# EAGLE board DDS Tone Shield (EAGLE 8.1.1)
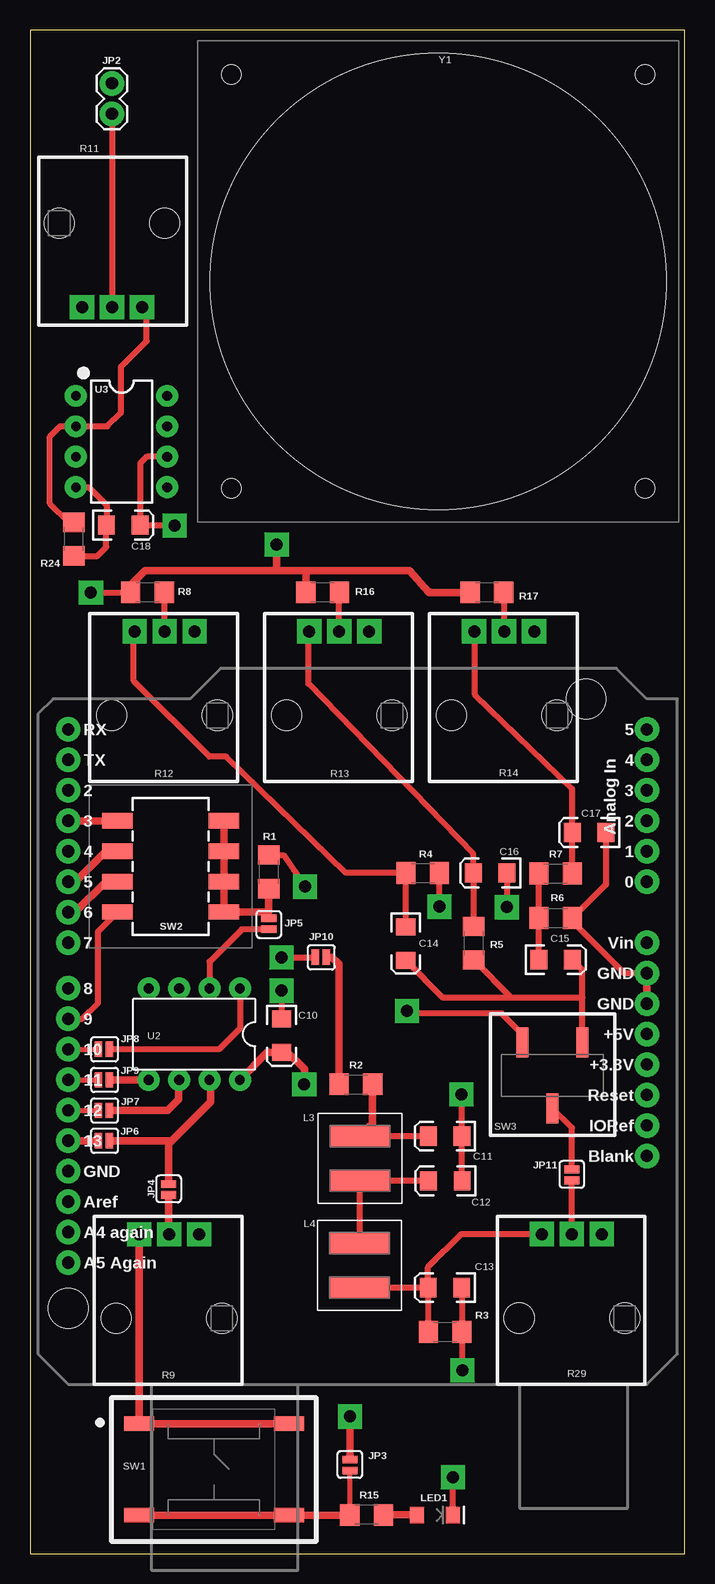
[diagram p0: board, top side]
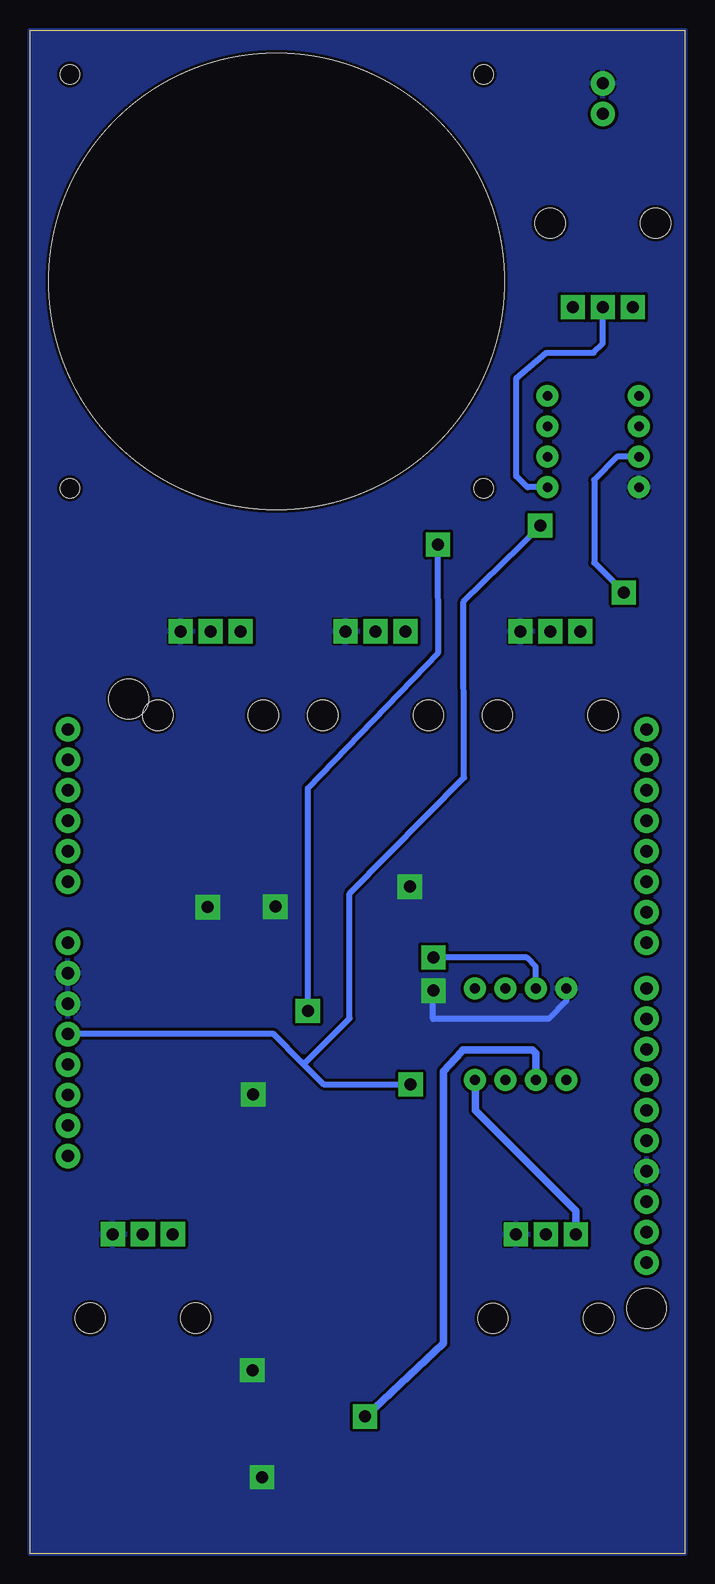
[diagram p1: board, bottom side, seen from below]

Size 54.61 x 127 mm. Coordinates in mm from the lower left corner, seen from the top.
Outline: 0,0 54.61,0 54.61,127 0,127 0,0
Copper layers (1*16): Top 0.035mm / dielectric 1.5mm / Bottom 0.035mm
Design rules "EA OthermillDRC_30_deg_v2": minimum track width 6mil, minimum drill 0.8mm, track to track 6mil, track to pad 6mil, pad to pad 6mil, via to via 6mil, smd to smd 0mil, copper to edge 0mil, drill to drill 6mil, minimum pad ring 20mil, minimum via ring 20mil, stop-mask expansion 1mil, vias tented up to drill 30mil, thermal gap 6mil

## Footprints (pad centres in the part's own frame; a part is rotated, then mirrored left to right if it is on the bottom)
EIA3216 = smd 1.4 x 1.6: A 1.4,0; C -1.4,0
DUEMILANOVE_SHIELD = drill 1.016 pad 1.88: 3.3V 50.8,26.67; 5V 50.8,29.21; A0 50.8,41.91; A1 50.8,44.45; A2 50.8,46.99; A3 50.8,49.53; A4 50.8,52.07; A5 50.8,54.61; AREF 2.54,15.24; AREF1 2.54,12.7; AREF2 2.54,10.16; D2 2.54,49.53; D3 2.54,46.99; D4 2.54,44.45; D5 2.54,41.91; D6 2.54,39.37; D7 2.54,36.83; D8 2.54,33.02; D9 2.54,30.48; D10 2.54,27.94; D11 2.54,25.4; D12 2.54,22.86; D13 2.54,20.32; GND@0 50.8,31.75; GND@1 50.8,34.29; GND@2 2.54,17.78; RES 50.8,24.13; RES1 50.8,21.59; RES2 50.8,19.05; RX 2.54,54.61; TX 2.54,52.07; VIN 50.8,36.83 | hole 3.302: 45.72,57.15; 2.54,6.35
1X02 = drill 1.016 pad 1.88: 1 0,0; 2 2.54,0
SMT-JUMPER_2_NC_PASTE_SILK = smd 0.635 x 1.27: 1 -0.506,0; 2 0.406,0
SDR0503-472JL = smd 5 x 1.8: P$1 0,1.85; P$2 0,-1.85
LED-1206 = smd 1.2 x 1.4: A -1.5,0; C 1.5,0
1206 = smd 1.6 x 1.8: 1 -1.4,0; 2 1.4,0
RK09K/RK09D_SERIES = drill 1 square: P$1 -2.5,-7; P$2 0,-7; P$3 2.5,-7 | hole 2.5: -4.4,0; 4.4,0
3CSH9_MEC_PUSHBUTTON = smd 2.5 x 1.2: P$1 -6.25,3.81; P$2 -6.25,-3.81; P$3 6.25,-3.81; P$4 6.25,3.81
DIPSWITCH-04-SMD = smd 1.27 x 2.54: 1 -3.81,4.445; 2 -1.27,4.445; 3 1.27,4.445; 4 3.81,4.445; 5 3.81,-4.445; 6 1.27,-4.445; 7 -1.27,-4.445; 8 -3.81,-4.445
JS102011SAQN = smd 1 x 2.5: P$1 -2.5,-2.75; P$2 2.5,-2.75; P$3 0,2.75
PDIP08_300MIL = drill 0.813: 1 -3.81,-3.81; 2 -1.27,-3.81; 3 1.27,-3.81; 4 3.81,-3.81; 5 3.81,3.81; 6 1.27,3.81; 7 -1.27,3.81; 8 -3.81,3.81
DIP08 = drill 0.813 pad 1.626: 1 -3.81,-3.81; 2 -1.27,-3.81; 3 1.27,-3.81; 4 3.81,-3.81; 5 3.81,3.81; 6 1.27,3.81; 7 -1.27,3.81; 8 -3.81,3.81
CSS-40408N = hole 1.6: -17.25,-17.25; 17.25,-17.25; 17.25,17.25; -17.25,17.25 | hole 38: 0,0

## Placement (x,y rotation side)
C10  100nF  [EIA3216]  20.99,43.16 270 top
C11  47nF  [EIA3216]  34.62,34.79 180 top
C12  100nF  [EIA3216]  34.64,31.07 180 top
C13  47nF  [EIA3216]  34.61,22.16 180 top
C14  22nF  [EIA3216]  31.34,50.84 270 top
C15  22nF  [EIA3216]  43.84,49.5 0 top
C16  22nF  [EIA3216]  38.38,56.72 180 top
C17  22nF  [EIA3216]  46.63,60.1 180 top
C18  100nF  [EIA3216]  7.78,85.73 0 top
FRAME2  FRAME-LEDGER  [CREATIVE_COMMONS]  0.71,146.77 0 top  (outside the outline)
JP1  Arduino jumpers  [DUEMILANOVE_SHIELD]  0.65,14.09 0 top
JP2  Speaker Header  [1X02]  6.84,120.01 90 top
JP3  JUMPER-SMT_2_NC_PASTE_SILK  [SMT-JUMPER_2_NC_PASTE_SILK]  26.68,7.42 90 top
JP4  JUMPER-SMT_2_NC_PASTE_SILK  [SMT-JUMPER_2_NC_PASTE_SILK]  11.57,30.4 90 top
JP5  JUMPER-SMT_2_NC_PASTE_SILK  [SMT-JUMPER_2_NC_PASTE_SILK]  19.91,52.44 270 top
JP6  JUMPER-SMT_2_NC_PASTE_SILK  [SMT-JUMPER_2_NC_PASTE_SILK]  6.22,34.41 0 top
JP7  JUMPER-SMT_2_NC_PASTE_SILK  [SMT-JUMPER_2_NC_PASTE_SILK]  6.22,36.93 0 top
JP8  JUMPER-SMT_2_NC_PASTE_SILK  [SMT-JUMPER_2_NC_PASTE_SILK]  6.22,42.04 0 top
JP9  JUMPER-SMT_2_NC_PASTE_SILK  [SMT-JUMPER_2_NC_PASTE_SILK]  6.22,39.48 0 top
JP10  JUMPER-SMT_2_NC_PASTE_SILK  [SMT-JUMPER_2_NC_PASTE_SILK]  24.3,49.7 0 top
JP11  JUMPER-SMT_2_NC_PASTE_SILK  [SMT-JUMPER_2_NC_PASTE_SILK]  45.19,31.61 90 top
L3  4.7mH  [SDR0503-472JL]  27.51,32.95 0 top
L4  4.7mH  [SDR0503-472JL]  27.48,24.03 0 top
LED1  BLUE  [LED-1206]  33.77,3.21 0 top
R1  10kohm  [1206]  19.93,56.82 90 top
R2  270ohm  [1206]  27.18,39.12 0 top
R3  270ohm  [1206]  34.62,18.48 0 top
R4  1kohm  [1206]  32.76,56.73 0 top
R5  3.9kohm  [1206]  37.01,50.87 90 top
R6  1kohm  [1206]  43.84,52.98 0 top
R7  3.9kohm  [1206]  43.84,56.69 0 top
R8  2200  [1206]  9.81,80.12 180 top
R9  5kohm  [RK09K/RK09D_SERIES]  11.6,19.6 180 top
R11  5kohm  [RK09K/RK09D_SERIES]  6.84,110.9 0 top
R12  10kohm  [RK09K/RK09D_SERIES]  11.22,69.87 180 top
R13  10kohm  [RK09K/RK09D_SERIES]  25.79,69.87 180 top
R14  10kohm  [RK09K/RK09D_SERIES]  39.55,69.87 180 top
R15  330ohm  [1206]  28.07,3.22 180 top
R16  2200  [1206]  24.41,80.12 180 top
R17  2200  [1206]  38.11,80.12 180 top
R24  270ohm  [1206]  3.67,84.56 90 top
R29  100k  [RK09K/RK09D_SERIES]  45.2,19.62 180 top
SW1  PUSHBUTTON  [3CSH9_MEC_PUSHBUTTON]  15.34,7.01 0 top
SW2  DIP-04SMD  [DIPSWITCH-04-SMD]  11.74,57.28 90 top
SW3  Slide Switch  [JS102011SAQN]  43.58,39.87 180 top
U2  ATTINY85-20P  [PDIP08_300MIL]  13.7,43.29 180 top
U3  LM386N  [DIP08]  7.64,92.69 270 top
Y1  Speaker  [CSS-40408N]  34.04,106.05 0 top

## Library data of the parts
C10-C18 FRAME2 = 1-Generic
JP1-JP11 L3 L4 R1-R9 R11-R17 R24 R29 SW1 SW3 U2 Y1 = DDS Tone Shield
LED1 = DDS Tone Shield; PROD_ID: DIO-09911
SW2 = DDS Tone Shield; PROD_ID: SWCH-12418
U3 = DDS Tone Shield; PROD_ID: IC-10899

## Nets
+5V: C10.A C18.A JP1.5V R9.P$3 SW1.P$1 SW1.P$4 U2.8 U3.6
AMP_NEG: R11.P$3 R24.2 U3.2
ATTINY_PROGRAM_1: JP4.2 JP6.2 U2.7
ATTINY_PROGRAM_SIGNAL_1: JP1.D13 JP6.1
ATTINY_PROGRAM_SIGNAL_2: JP1.D12 JP7.1
ATTINY_PROGRAM_SIGNAL_3: JP1.D11 JP9.1
ATTINY_PROGRAM_SIGNAL_4: JP1.D10 JP8.1
BPF_ATTENUATED: R14.P$2 R17.1
BPF_INTERMEDIATE: C15.C R6.1 R7.1
BPF_OUT: C17.A R7.2 R14.P$3
CHEBYSHEV_IN: JP10.2 R2.1
CHEBYSHEV_OUT: JP11.1 R29.P$2
CHEBYSHEV_STAGE_1: C11.A L3.P$1 R2.2
CHEBYSHEV_STAGE_2: C12.A L3.P$2 L4.P$1
CHEBYSHEV_STAGE_3: C13.A L4.P$2 R3.1 R29.P$3
DDS_TONE_OUTPUT: JP10.1 U2.3
EQ_IN: C14.A C15.A R5.1 SW3.P$1
EQ_OUT: R8.2 R16.2 R17.2 SW3.P$2 U3.3
GND: C10.C C11.C C12.C C13.C C16.C C17.C C18.C JP1.GND@0 JP1.GND@1 JP1.GND@2 JP2.2 LED1.C R1.2 R3.2 R4.2 R6.2 R9.P$1 R12.P$1 R13.P$1 R14.P$1 R24.1 R29.P$1 U2.4 U3.4
HPF_ATTENUATED: R8.1 R12.P$2
HPF_OUT: C14.C R4.1 R12.P$3
LED_POSITIVE: LED1.A R15.1
LPF_ATTENUATED: R13.P$2 R16.1
LPF_OUT: C16.A R5.2 R13.P$3
PROGRAM3: JP9.2 U2.5
PROGRAM4: JP8.2 U2.1
SLIDE_SWITCH_IN: JP11.2 SW3.P$3
SPEAKER_IN: JP2.1 R11.P$2 U3.5
STATE_SWITCH: JP3.2 JP7.2 U2.6
STATE_SWITCH_OUT: JP3.1 R15.2 SW1.P$2 SW1.P$3
UNO_TONE_1: JP1.D3 SW2.4
UNO_TONE_2: JP1.D5 SW2.3
UNO_TONE_3: JP1.D6 SW2.2
UNO_TONE_4: JP1.D9 SW2.1
UNO_TONE_MASTER: JP5.2 U2.2
UNO_TONE_MASTER_OUT: JP5.1 R1.1 SW2.5 SW2.6 SW2.7 SW2.8
VAR_FREQ_OUT: JP4.1 R9.P$2

## Tracks (layer width: path | path; a pad name or v marks a point on that pad's centre or on a via)
+5V  (via drill 1)
  Top 0.508: U3.6 9.73,91.42 9.19,90.88 C18.A 9.22,85.69 v12.07,85.69
  Top 0.61: SW1.P$4 SW1.P$1 R9.P$3 | C10.A 19.79,41.76 U2.8 | C10.A 21.18,41.76 | C10.A 21.5,41.76 22.88,40.38 v22.88,39.12 v22.87,39.11
  Bottom 0.508: v22.87,39.11 30.13,39.12 31.9,40.9 | JP1.5V 51.41,43.34 34.35,43.34 31.9,40.9 | 31.9,40.9 31.66,40.9 27.95,44.61 27.95,55.02 18.42,64.67 18.46,79.35 12.07,85.62 v12.07,85.69
  Bottom 0.61: R9.P$3 9.1,28.58 17.46,36.94 17.46,39.43 U2.8
AMP_NEG
  Top 0.508: R24.2 3.22,85.96 1.65,87.53 1.65,93.1 2.51,93.96 U3.2 6.46,93.96 7.6,95.1 7.6,98.93 9.74,101.07 9.74,103.89 R11.P$3
ATTINY_PROGRAM_1
  Top 0.61: 11.82,34.41 JP6.2 | 11.82,34.41 15.06,37.65 15.06,39.39 U2.7 | JP4.2 11.57,34.16 11.82,34.41
ATTINY_PROGRAM_SIGNAL_1
  Top 0.61: JP1.D13 JP6.1
ATTINY_PROGRAM_SIGNAL_2
  Top 0.406: JP1.D12 5.72,36.95 JP7.1
ATTINY_PROGRAM_SIGNAL_3
  Top 0.406: JP1.D11 JP9.1
ATTINY_PROGRAM_SIGNAL_4
  Top 0.406: JP1.D10 JP8.1
BPF_ATTENUATED
  Top 0.508: R14.P$2 39.55,80.08 R17.1
BPF_INTERMEDIATE
  Top 0.508: C15.C R6.1 R7.1
BPF_OUT
  Top 0.508: R7.2 C17.A 45.23,63.75 37.12,71.57 37.12,76.8 R14.P$3
CHEBYSHEV_IN
  Top 0.61: JP10.2 25.2,49.7 25.76,49.14 25.76,39.14 R2.1
CHEBYSHEV_OUT
  Top 0.508: R29.P$2 45.2,31.19 JP11.1
CHEBYSHEV_STAGE_1
  Top 0.508: L3.P$1 C11.A
  Top 0.61: R2.2 28.58,35.87 L3.P$1
CHEBYSHEV_STAGE_2
  Top 0.508: L4.P$1 27.51,25.91 L3.P$2 33.21,31.1 C12.A
CHEBYSHEV_STAGE_3
  Top 0.508: L4.P$2 33.19,22.18 C13.A | C13.A R3.1 | C13.A 33.21,23.88 35.97,26.64 42.33,26.64 R29.P$3
DDS_TONE_OUTPUT  (via drill 1)
  Top 0.508: JP10.1 23.88,49.69 v20.97,49.69
  Bottom 0.508: v20.97,49.69 20.95,49.67 13.19,49.67 12.43,48.91 U2.3
EQ_IN
  Top 0.508: 45.29,49.45 C15.A 46.08,48.66 46.08,46.32 | SW3.P$1 46.08,46.32 | 46.08,46.32 40.16,46.32 | 40.16,46.32 R5.1 | 40.16,46.32 34.46,46.32 C14.A
EQ_OUT  (via drill 1)
  Top 0.508: R16.2 | 8.44,80.15 R8.2 8.39,80.1 v5.08,80.1 | SW3.P$2 41.08,43.28 39.32,45.04 31.63,45.04 v31.44,45.23
  Top 0.61: R17.2 33.35,80.12 | 33.35,80.12 33.34,80.13 | 33.35,80.12 33.26,80.12 31.66,81.95 23,81.95 | R8.2 8.48,80.19 8.48,80.81 9.62,81.95 20.62,81.95 | 20.62,81.95 23,81.95 | R16.2 23.01,81.94 23,81.95 | v20.58,84.11 20.58,81.99 20.62,81.95
  Bottom 0.508: v31.44,45.23 31.44,63.8 20.56,75.12 v20.58,84.11 | U3.3 5.64,91.42 7.57,89.49 7.57,82.6 v5.07,80.1 v5.08,80.1
GND  (via drill 1)
  Top 0.508: C10.C 20.97,44.37 v20.97,46.92 | C13.C R3.2 36.02,15.31 v36.07,15.26 | LED1.C v35.27,6.35 | C12.C 36.04,34.77 C11.C 36.02,38.24 v35.99,38.27 | R4.2 34.16,54.13 v34.15,53.92 | C16.C v39.78,53.88 | C17.C 48.03,55.77 R6.2 45.24,52.68 49.54,48.38 JP1.GND@1 | U3.4 4.9,88.88 6.4,87.38 6.4,85.75 C18.C 6.37,83.91 5.62,83.16 R24.1 | R1.2 21.14,58.22 v22.94,55.59
  Top 0.61: JP1.GND@1 JP1.GND@0
  Bottom 0.508: U2.4 9.89,46.05 11.36,44.58 20.97,44.58 C10.C 20.99,46.74 20.97,46.76 v20.97,46.92 | v36.07,15.26 v36.06,15.27
  pour Bottom (isolate 0.254): 0,0 54.61,0 54.61,127 0,127
HPF_ATTENUATED
  Top 0.508: R12.P$2 11.22,80.11 R8.1
HPF_OUT
  Top 0.508: C14.C 31.34,56.71 R4.1 26.36,56.73 16.37,66.43 14.98,66.43 8.66,72.75 8.66,76.81 R12.P$3
LED_POSITIVE
  Top 0.61: LED1.A R15.1
LPF_ATTENUATED
  Top 0.508: R13.P$2 25.79,80.1 R16.1
LPF_OUT
  Top 0.508: R5.2 37.01,56.69 C16.A 36.98,58.32 23.23,72.51 23.23,76.81 R13.P$3
PROGRAM3
  Top 0.61: JP9.2 U2.5
PROGRAM4
  Top 0.508: U2.1 17.51,43.77 15.77,42.03 JP8.2
SLIDE_SWITCH_IN
  Top 0.508: JP11.2 45.19,35.51 SW3.P$3
SPEAKER_IN
  Top 0.508: JP2.1 R11.P$2
  Bottom 0.508: U3.5 13.13,88.88 14.06,89.81 14.06,97.96 11.53,100.1 7.62,100.1 6.86,100.86 6.86,103.88 R11.P$2
STATE_SWITCH  (via drill 1)
  Top 0.61: JP7.2 11.48,36.93 12.41,37.86 12.41,39.46 U2.6 | v26.68,11.42 JP3.2
  Bottom 0.61: v26.68,11.42 v26.67,11.41 26.64,11.41 20.15,17.53 20.15,40.17 18.65,41.82 18.49,41.98 12.72,41.98 12.43,41.69 U2.6
STATE_SWITCH_OUT
  Top 0.406: R15.2 JP3.1
  Top 0.61: SW1.P$2 SW1.P$3 26.65,3.2 R15.2
UNO_TONE_1
  Top 0.61: JP1.D3 SW2.4
UNO_TONE_2
  Top 0.61: JP1.D5 3.78,56 6.35,58.57 7.27,58.57 SW2.3
UNO_TONE_3
  Top 0.61: JP1.D6 3.77,53.46 6.31,56 7.28,56 SW2.2
UNO_TONE_4
  Top 0.508: JP1.D9 4.37,44.57 5.67,45.87 5.67,51.84 SW2.1
UNO_TONE_MASTER
  Top 0.508: U2.2 14.97,49.32 17.68,52.03 JP5.2
UNO_TONE_MASTER_OUT
  Top 0.508: 19.9,53.47 19.9,52.86 JP5.1
  Top 0.61: SW2.5 SW2.6 SW2.7 SW2.8 19.9,53.47 19.9,55.39 R1.1
VAR_FREQ_OUT
  Top 0.61: JP4.1 11.57,26.63 R9.P$2